# Altium PCB xiqiu.PcbDoc
Units mil, origin at the board's own origin, x right, y up, seen from the top; angles counter-clockwise.
Board outline 2395 x 750 mil, 2 copper layers (Top Layer, Bottom Layer); 20 components, 49 nets, 125 pads, 18 vias.
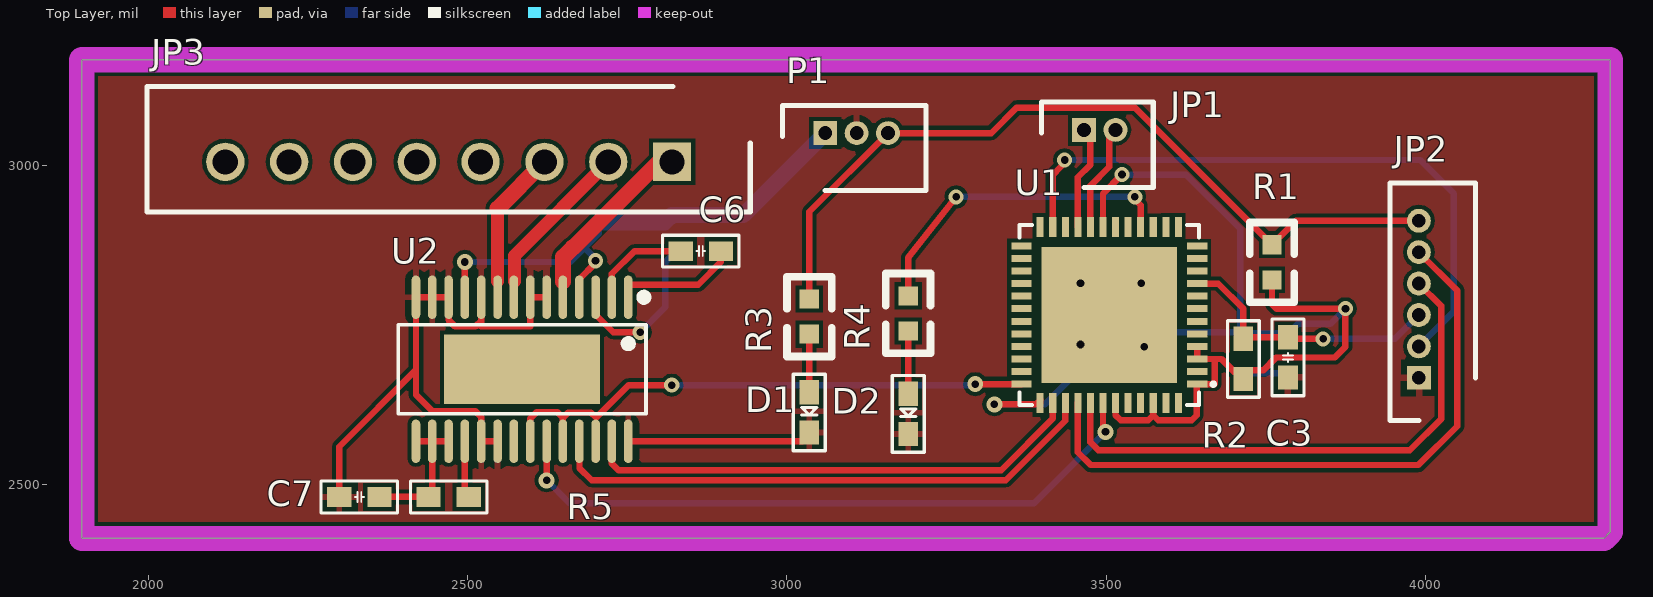
[diagram p0: Top Layer view]
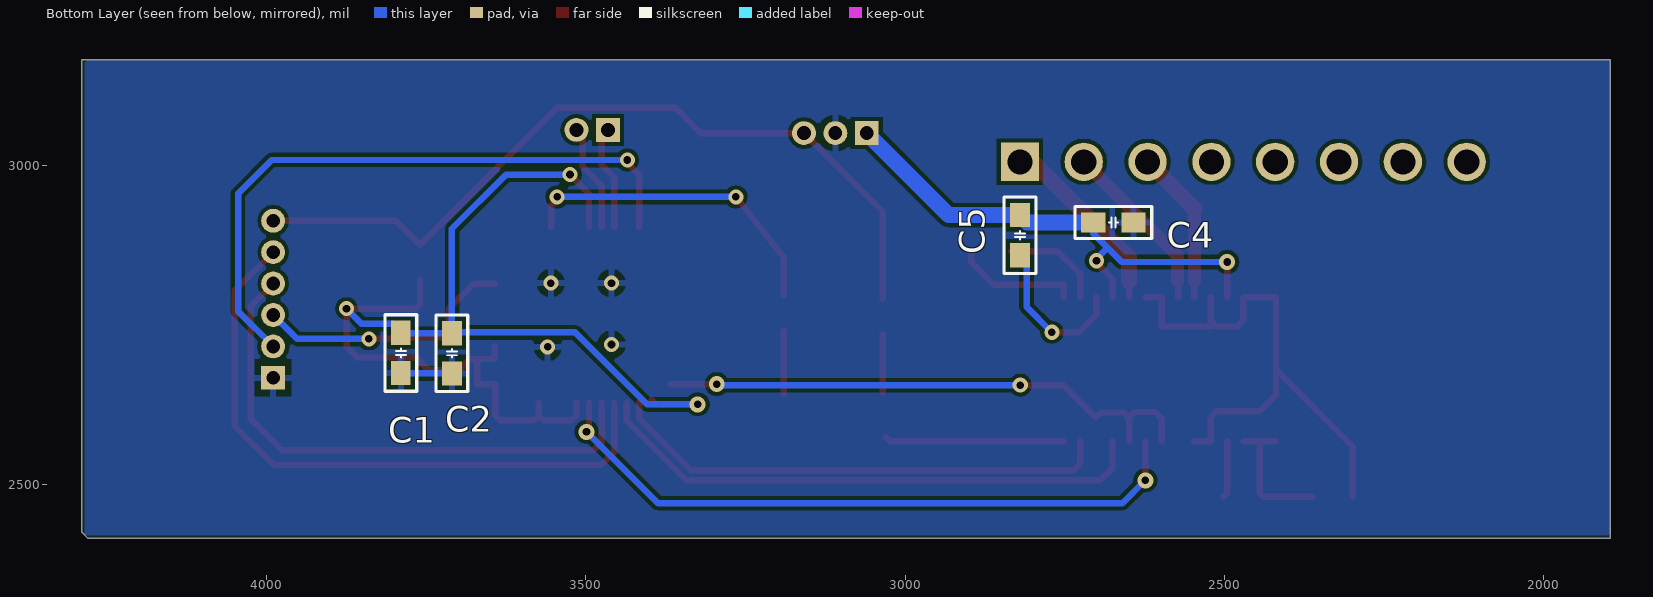
[diagram p1: Bottom Layer view, seen from below]

## Layer stack, top to bottom
Top Solder: solder mask 0.4, Solder Resist, Dk 3.5
Top Layer: signal copper 1.4
Dielectric 1: dielectric 12.6, FR-4, Dk 4.8
Bottom Layer: signal copper 1.4
Bottom Solder: solder mask 0.4, Solder Resist, Dk 3.5

## Board outline
1895,2415 1895,3165 4290,3165 4290,2425 4280,2415

## Design rules (kind name [scope] priority, off if disabled: settings)
Clearance [All] p1: gap=6 ignorepadtopadclearanceinfootprint=FALSE
HoleToHoleClearance [All] p1: gap=0 allowstackedmicrovias=TRUE
MinimumSolderMaskSliver [All] p1: minsoldermaskwidth=0
PolygonConnect [All] p1: connectstyle=Relief reliefconductorwidth=10 reliefentries=4 polygonreliefangle="90 Angle" airgapwidth=10
RoutingVias [All] p1: holewidth=12 width=25 viastyle="Through Hole" minholewidth=12 minwidth=25 maxholewidth=12 maxwidth=25
SilkToSilkClearance [All] p1: silktosilkclearance=0
SilkToSolderMaskClearance [IsPad] p1: minsilkscreentomaskgap=0 clearancetoexposedcopper=TRUE
SolderMaskExpansion [All] p1: expansion=4
Width [All] p1: maxlimit=40 minlimit=10 preferedwidth=10
26 further rules are at their usual default settings.

## Classes and differential pairs
component class xiqiu: C1 C2 C3 C4 C5 C6 C7 D1 D2 JP1 JP3 P1 R1 R2 R3 R4 R5 U1

## Components (designator, comment, footprint, x,y, rotation, side; value= is the part's Value field where it differs from the comment)
C1 "10uF" 0603C 3710,2704.95 r90 bottom
C2 "100nF" 0603C 3790,2705.51 r90 bottom
C3 "1uF" 0603C 3785,2698.5 r90 top
C4 "10uF" 0603C 2673.5,2910 r0 bottom
C5 "100nF" 0603C 2820,2890 r90 bottom
C6 "10nF" 0603C 2865,2865 r0 top
C7 "1uF" 0603C 2330,2480 r0 top
D1 "蓝灯 0603" 0603_diode 3035,2612.3 r270 top
D2 "蓝灯 0603" 0603_diode 3190,2610 r270 top
JP1 "Header 2" SHDR2 3465.62,3055 r180 top
JP2 "SPI1" SHDR6 3990,2666.58 r90 top
JP3 "8 HEADER" "8P - WF25122" 2470,3005 r90 top
P1 "TB002-500-03BE" SHDR3 3060,3050 r180 top
R1 "0Ω (0R0) ±1%" 0603 3760,2820 r90 top
R2 "10K" 0603R 3715,2696.1 r270 top
R3 "2KΩ" 0603 3035,2735 r90 top
R4 "2KΩ" 0603 3190,2740 r90 top
R5 "10K" 0603R 2470,2480 r0 top
U1 "ESP32-PICO-D4" pico 3494.07,2765.01 r90 top
U2 "DRV8313PWPR" HTSSOP-28_L9.8-W4.5-P0.65-LS6.6-BL-EP 2585,2680 r180 top

## Footprints (in the part's own frame and the unit in brackets; to place one, negate y for a bottom-side part, rotate by r counter-clockwise, add the part's x,y. Pads: shape width x height; smd on the part's side, far side on the other; paste and mask are expansions set on the pad)
"8P - WF25122" [mil] "Used for Motor connecter in ZJUNlict"
  rect 60x60 hole 39.37: 1(0,-350)
  round 60 hole 39.37: 2(0,-250) 3(0,-150) 4(0,-50) 5(0,50) 6(0,150) 7(0,250) 8(0,350)
  silkscreen extent -79,-472 118,472
0603 [mil]
  rect 30x30 smd: 1(0,0) 2(55,0)
  silkscreen extent -35,-35 90,35
0603_diode [mil]
  rect 38x31 smd: 1(-31.5,0) 2(31.5,0)
  silkscreen extent -60,-25 60,25
0603C [mil]
  rect 38x31 smd: 1(-31.5,0) 2(31.5,0)
  silkscreen extent -60,-25 60,25
0603R [mil]
  rect 38x31 smd: 1(-31.5,0) 2(31.5,0)
  silkscreen extent -60,-25 60,25
HTSSOP-28_L9.8-W4.5-P0.65-LS6.6-BL-EP [mil]
  oval 13.5x68.2 smd mask+2: 1(-166.3,-112.8) 2(-140.7,-112.8) 3(-115.2,-112.8) 4(-89.6,-112.8) 5(-64,-112.8) 6(-38.4,-112.8) 7(-12.8,-112.8) 8(12.8,-112.8) 9(38.4,-112.8) 10(64,-112.8) 11(89.6,-112.8) 12(115.2,-112.8) 13(140.8,-112.8) 14(166.3,-112.8) 15(166.3,112.8) 16(140.8,112.8) 17(115.2,112.8) 18(89.6,112.8) 19(64,112.8) 20(38.4,112.8) 21(12.8,112.8) 22(-12.8,112.8) 23(-38.4,112.8) 24(-64,112.8) 25(-89.6,112.8) 26(-115.2,112.8) 27(-140.7,112.8) 28(-166.3,112.8)
  rect 244.1x108.3 smd mask+2: 29(0,0)
  silkscreen extent -197,-119 194,70
pico [mm]
  rect 0.28x0.8 smd: 1(-2.75,-3.778) 2(-2.25,-3.778) 3(-1.75,-3.778) 4(-1.25,-3.778) 5(-0.75,-3.778) 6(-0.25,-3.778) 7(0.25,-3.778) 8(0.75,-3.778) 9(1.25,-3.778) 10(1.75,-3.778) 11(2.25,-3.778) 12(2.75,-3.778) 25(2.75,3.222) 26(2.25,3.222) 27(1.75,3.222) 28(1.25,3.222) 29(0.75,3.222) 30(0.25,3.222) 31(-0.25,3.222) 32(-0.75,3.222) 33(-1.25,3.222) 34(-1.75,3.222) 35(-2.25,3.222) 36(-2.75,3.222)
  rect 0.8x0.28 smd: 13(3.5,-3.027) 14(3.5,-2.527) 15(3.5,-2.027) 16(3.5,-1.527) 17(3.5,-1.027) 18(3.5,-0.527) 19(3.5,-0.027) 20(3.5,0.473) 21(3.5,0.973) 22(3.5,1.473) 23(3.5,1.973) 24(3.5,2.473) 37(-3.5,2.473) 38(-3.5,1.972) 39(-3.5,1.473) 40(-3.5,0.972) 41(-3.5,0.473) 42(-3.5,-0.028) 43(-3.5,-0.527) 44(-3.5,-1.028) 45(-3.5,-1.527) 46(-3.5,-2.028) 47(-3.5,-2.527) 48(-3.5,-3.028)
  rect 5.4x5.4 smd: 49(0,-0.278)
  silkscreen extent -3.58,-4.49 3.58,3.3
SHDR2 [mm]
  rect 0.95x0.95 hole 0.55: 1(0,0)
  round 0.95 hole 0.55: 2(-1.25,0)
  silkscreen extent -2.75,-1.11 1.7,2.29
SHDR3 [mm]
  rect 0.95x0.95 hole 0.55: 1(0,0)
  round 0.95 hole 0.55: 2(-1.25,0) 3(-2.5,0)
  silkscreen extent -4,-1.11 1.7,2.29
SHDR6 [mm]
  rect 0.95x0.95 hole 0.55: 1(0,0)
  round 0.95 hole 0.55: 2(1.25,0) 3(2.5,0) 4(3.75,0) 5(5,0) 6(6.25,0)
  silkscreen extent -1.7,-2.25 7.75,1.15

## Part data
C1 C4: SuppliersPartNumber=C19702, ComponentLink1Description=供应商链接, ComponentLink1URL=http://www.szlcsc.com/product/details_20411.html, Supplier=LC
C2 C5: SuppliersPartNumber=C14663, ComponentLink1Description=供应商链接, ComponentLink1URL=http://www.szlcsc.com/product/details_15331.html, Supplier=LC
C3 C7: SuppliersPartNumber=C15849, ComponentLink1Description=供应商链接, ComponentLink1URL=http://www.szlcsc.com/product/details_16531.html, Supplier=LC
C6: SuppliersPartNumber=C57112, ComponentLink1Description=供应商链接, ComponentLink1URL=http://www.szlcsc.com/product/details_58143.html, Supplier=LC
D1 D2: SuppliersPartNumber=C72041, ComponentLink1Description=供应商链接, ComponentLink1URL=http://www.szlcsc.com/product/details_73150.html, Supplier=LC
JP1: "Header, 2-Pin", LatestRevisionDate=17-Jul-2002, LatestRevisionNote="Re-released for DXP Platform.", Publisher="Altium Limited"
JP2: library part "HEADER 6"
JP3: "8 Pin Header"
P1: Supplier Part Number 1=490-TB002-500-03BE, Supplier 1=Mouser
R1: SuppliersPartNumber=C21189, ComponentLink1Description=供应商链接, ComponentLink1URL=http://www.szlcsc.com/product/details_21903.html, Supplier=LC
R2 R5: SuppliersPartNumber=C25804, ComponentLink1Description=供应商链接, ComponentLink1URL=http://www.szlcsc.com/product/details_26547.html, Supplier=LC
R3 R4: SuppliersPartNumber=C22975, ComponentLink1Description=供应商链接, ComponentLink1URL=http://www.szlcsc.com/product/details_23702.html, Supplier=LC

## Via types
v1: diameter 23.62/23.62 (per signal layer), hole 12, Top Layer to Bottom Layer, 13 vias
v2: diameter 25, hole 12, Top Layer to Bottom Layer, 5 vias

## Nets (pads, with @x,y where several pads share a name; then routed paths per layer and width w, separated by ;. In a path a pad name is that pad's centre, name@x,y a point inside that pad or via, vN(x,y) a via of type N, cw(c..) or ccw(c..) an arc to the next point about the centre after c; other vN are vias at no path point)
EN: C3.2 JP2.3 R2.1 U1.9 | length 417.1
  Top Layer w10: U1.9 3676,2814.22 3715,2775.22 R2.1@3715,2737.99 ; R2.1@3715,2730 C3.2 3787.4,2727.6 v1(3840,2727.6)
  Bottom Layer w10: v1(3840,2727.6) 3952.6,2727.6 JP2.3
ENA: U1.36 U2.22 U2.24 U2.26 | length 885.2
  Top Layer w10: U2.22 2597.8,2602.8 2608,2613 2640,2613 2649,2604 ; U2.24 2649,2604 ; v1(2819.45,2655) 2751.76,2655 2718.05,2621.29 2701.56,2604.8 ; v2(3295,2656.73) U1.36 ; 2649,2604 2657.3,2612.3 2692.7,2612.3 2700.2,2604.8 ; 2700.2,2604.8 2701.56,2604.8 ; 2700.2,2604.8 2701.56,2604.8
  Bottom Layer w10: v1(2819.45,2655) 3293.27,2655 v2(3295,2656.73) v2@3290.73,2661
FLASH_CLK: U1.31
FLASH_CS: U1.25
FLASH_SD0: U1.27
FLASH_SD1: U1.33
FLASH_SD2: U1.30
FLASH_SD3: U1.32
GND: C1.1 C2.1 C3.1 C4.1 C7.1 D1.2 D2.2 JP2.1 P1.2 U1.49 U2.6 U2.7 U2.10 U2.12 U2.13 U2.14 U2.19 U2.20 U2.28 | length 1303.9
  Top Layer w10: C7.1 2298.5,2558.8 2418.7,2679 ; U2.10 2521,2756 ; U2.20 U2.19 2521,2605 2512,2614 2444.7,2614 2418.7,2640 2418.7,2679 ; U2.6 U2.7 2597.8,2747 2521,2747 2521,2756 ; U2.28 3023.7,2567.2 D1.2@3030,2573.5 ; 2418.7,2679 U2.14 U2.13 U2.12 2469.8,2757.2 2480,2747 2512,2747 2521,2756
  Bottom Layer w10: C1.1 C2.1@3778.54,2673.45 ; C2.1@3778.54,2673.45 3790,2661.99 C2.1@3778.54,2673.45
  other v1: 3560,2715 3460,2718.66 3460,2815 3555,2815
GPIO0: JP2.2 U1.23 | length 994.7
  Top Layer w10: U1.23 3416.41,2984.41 v1@3430,2998
  Bottom Layer w10: v1(3435,3007.81) 3660.62,3007.81 3992.19,3007.81 4045,2955 4045,2770.79 JP2.2
GPIO2: U1.22
GPIO4: U1.24
GPIO5: U1.34
GPIO9: U1.28
GPIO10: U1.29
GPIO12: U1.18
GPIO13: JP1.2 U1.20 | length 168.5
  Top Layer w10: U1.20 3475.46,2967.72 3505,2997.26 3505,3045.17 JP1.2
GPIO14: U1.17
GPIO15: JP1.1 U1.21 | length 164
  Top Layer w10: U1.21 3455.78,2980.78 3475,3000 3475,3045.62 JP1.1
GPIO18: U1.35
GPIO19: U1.38 U2.27 | length 787.7
  Top Layer w10: U2.27 2725.7,2532.3 2736,2522 3335.5,2522 3416.42,2602.92 U1.38
GPIO21: U1.42 U2.23 | length 1044.9
  Top Layer w10: v2(2623.4,2506) U2.23 ; U1.42 3495.16,2585.84 v2(3499,2582)
  Bottom Layer w10: v2(2623.4,2506) 2659.4,2470 3387,2470 v2(3499,2582)
GPIO22: U1.39 U2.25 | length 878
  Top Layer w10: U2.25 2675,2566.8 2675,2525 2694,2506 3343,2506 3436.1,2599.1 U1.39
GPIO25: U1.14
GPIO26: U1.15
GPIO27: R4.2 U1.16 | length 512.1
  Top Layer w10: R4.2 3190,2855 v1(3265,2950) ; v1(3545,2950) 3545,2946.31 3554.2,2937.11 U1.16
  Bottom Layer w10: v1(3265,2950) v1(3545,2950)
GPIO32: U1.12
GPIO33: U1.13
GPIO34: U1.10
GPIO35: U1.11
GPIO37: U1.7
GPIO38: U1.6
NetC5_1: C5.1 U2.3 | length 250
  Top Layer w10: U2.3@2700,2793 U2.3 2700.2,2765.45 2727.66,2737.99 v1(2770,2737.99)
  Bottom Layer w10: v1(2770,2737.99) 2809.5,2777.49 2809.5,2848 C5.1
NetC6_1: C6.1 U2.2 | length 159.3
  Top Layer w10: U2.2 2725.7,2829.6 2761.1,2865 C6.1
NetC6_2: C6.2 U2.1 | length 305.9
  Top Layer w10: U2.1 U2.1@2751.3,2812.26 ; C6.2 2896.5,2848 2860.76,2812.26 ; U2.1@2751.3,2812.26 2860.76,2812.26 ; U2.1@2751.3,2812.26 2860.76,2812.26
NetC7_2: C7.2 R5.1 U2.15 U2.16 U2.17 | length 217.7
  Top Layer w10: C7.2 R5.1 2444.2,2485.7 U2.16 ; U2.15 U2.16 ; U2.17 U2.16
NetD1_A: D1.1 R3.1 | length 91.2
  Top Layer w10: D1.1 R3.1
NetD2_A: D2.1 R4.1 | length 98.5
  Top Layer w10: D2.1 R4.1
NetR5_2: R5.2 U2.18 | length 89.7
  Top Layer w10: U2.18 2495.4,2486.1 R5.2
RXD: JP2.5 U1.40 | length 1002.3
  Top Layer w10: U1.40 3455.79,2550 3475.79,2530 3989.14,2530 4050,2590.86 4050,2803.43 JP2.5
SENSOR_VN: U1.8
SENSOR_VP: U1.5
TXD: JP2.4 U1.41 | length 863.4
  Top Layer w10: U1.41 3475.47,2565.53 3488,2553 3976,2553 4025,2602 4025,2779.21 JP2.4
U: JP3.1 U2.5 | length 295.5
  Top Layer w10: U2.5 U2.5@2649,2817.8
  Top Layer w25: U2.5@2649,2817.8 2649.35,2818.15 2649.35,2854.35 2649.35,2855.61 2664.14,2870.4 2665.4,2870.4 2800,3005 JP3.1
V: JP3.2 U2.8 | length 274.6
  Top Layer w10: U2.8 U2.8@2572.2,2817.8 ; U2.8@2572.2,2817.8 2572.95,2817.8 U2.8@2572.2,2817.8
  Top Layer w20: U2.8@2572.95,2817.8 2572.95,2857.95 JP3.2
VDD3V3: JP2.6 P1.3 R1.2 R3.2 | length 1263.9
  Top Layer w10: R3.2 3035,2926.58 P1.3 3320,3050 3360,3090 3545,3090 R1.2 3797.64,2912.64 JP2.6
VDD33: C1.2 C2.2 R1.1 R2.2 U1.1 U1.3 U1.4 U1.19 U1.37 U1.43 U1.46 | length 1967.3
  Top Layer w10: v2(3325,2625) 3389.73,2625 3396.73,2632 U1.37 ; U1.19 3495.15,2955.15 v1(3525,2985) ; U1.43 3514.84,2608 3522.84,2600 3565.9,2600 3573.9,2608 ; U1.46 3573.9,2608 ; U1.4 3642.8,2705.01 U1.3 3670,2696.11 ; R2.2 3715,2668.1 3725.5,2678.6 3746.55,2678.6 3766.32,2698.38 3858.38,2698.38 3875,2715 v1(3875,2775) 3767,2775 3760,2782 R1.1 ; R2.2@3715,2674.99 3702,2674.99 3680.88,2696.11 3670,2696.11 ; 3573.9,2608 3581.9,2600 3634,2600 3642,2608 3642,2656.74 U1.1 3669.74,2656.74 3670,2657 3670,2696.11
  Bottom Layer w10: v2(3325,2625) 3404.32,2625 3517.13,2737.81 3708.64,2737.81 C1.2 ; v1(3525,2985) 3625,2985 3710,2900 3710,2756 C1.2 ; v1(3875,2775) 3851.01,2751.01 3800.5,2751.01 3790,2740.51 C2.2 3789.44,2736.45 C1.2
VIN: C4.2 C5.2 P1.1 U2.4 U2.11 | length 808.9
  Top Layer w10: U2.11 v2(2495.4,2848) ; U2.4 2674.6,2821.1 2700,2846.5 v1(2700,2850)
  Bottom Layer w10: v2(2495.4,2848) 2660.4,2848 2705,2892.6 C4.2 ; 2682.7,2870.3 2700,2853 v1(2700,2850)
  Bottom Layer w25: C4.2 2808.5,2910 C5.2 2931.5,2921.5 P1.1
W: JP3.3 U2.9 | length 242.6
  Top Layer w10: U2.9 U2.9@2546.6,2817.8
  Top Layer w20: U2.9@2546.6,2817.8 2546.6,2931.6
  Top Layer w25: 2546.6,2931.6 JP3.3
pads on no net: JP3.4 JP3.5 JP3.6 JP3.7 JP3.8 U1.2 U1.26 U1.44 U1.45 U1.47 U1.48 U2.21 U2.29

## Polygon pours and split planes (outlines as drawn)
GND on Top Layer (solid, pour order 2): 1895,3160 1895,2415 4280,2415 4290,2425 4290,3165
GND on Bottom Layer (solid, pour order 4): 1895,3165 1895,2415 1900,2420 4285,2420 4285,3160 4280,3165

## Keep-outs
Top Layer:
  the board outline again, w39.37